# Altium PCB Mach_nap_HEALA.PcbDoc
Units mm, origin at the board's own origin, x right, y up, seen from the top; angles counter-clockwise.
Board outline 30 x 30 mm, 2 copper layers (Top Layer, Bottom Layer); 14 components, 14 nets, 60 pads, 0 vias.
Unrouted connection lines stored in the file: 36.
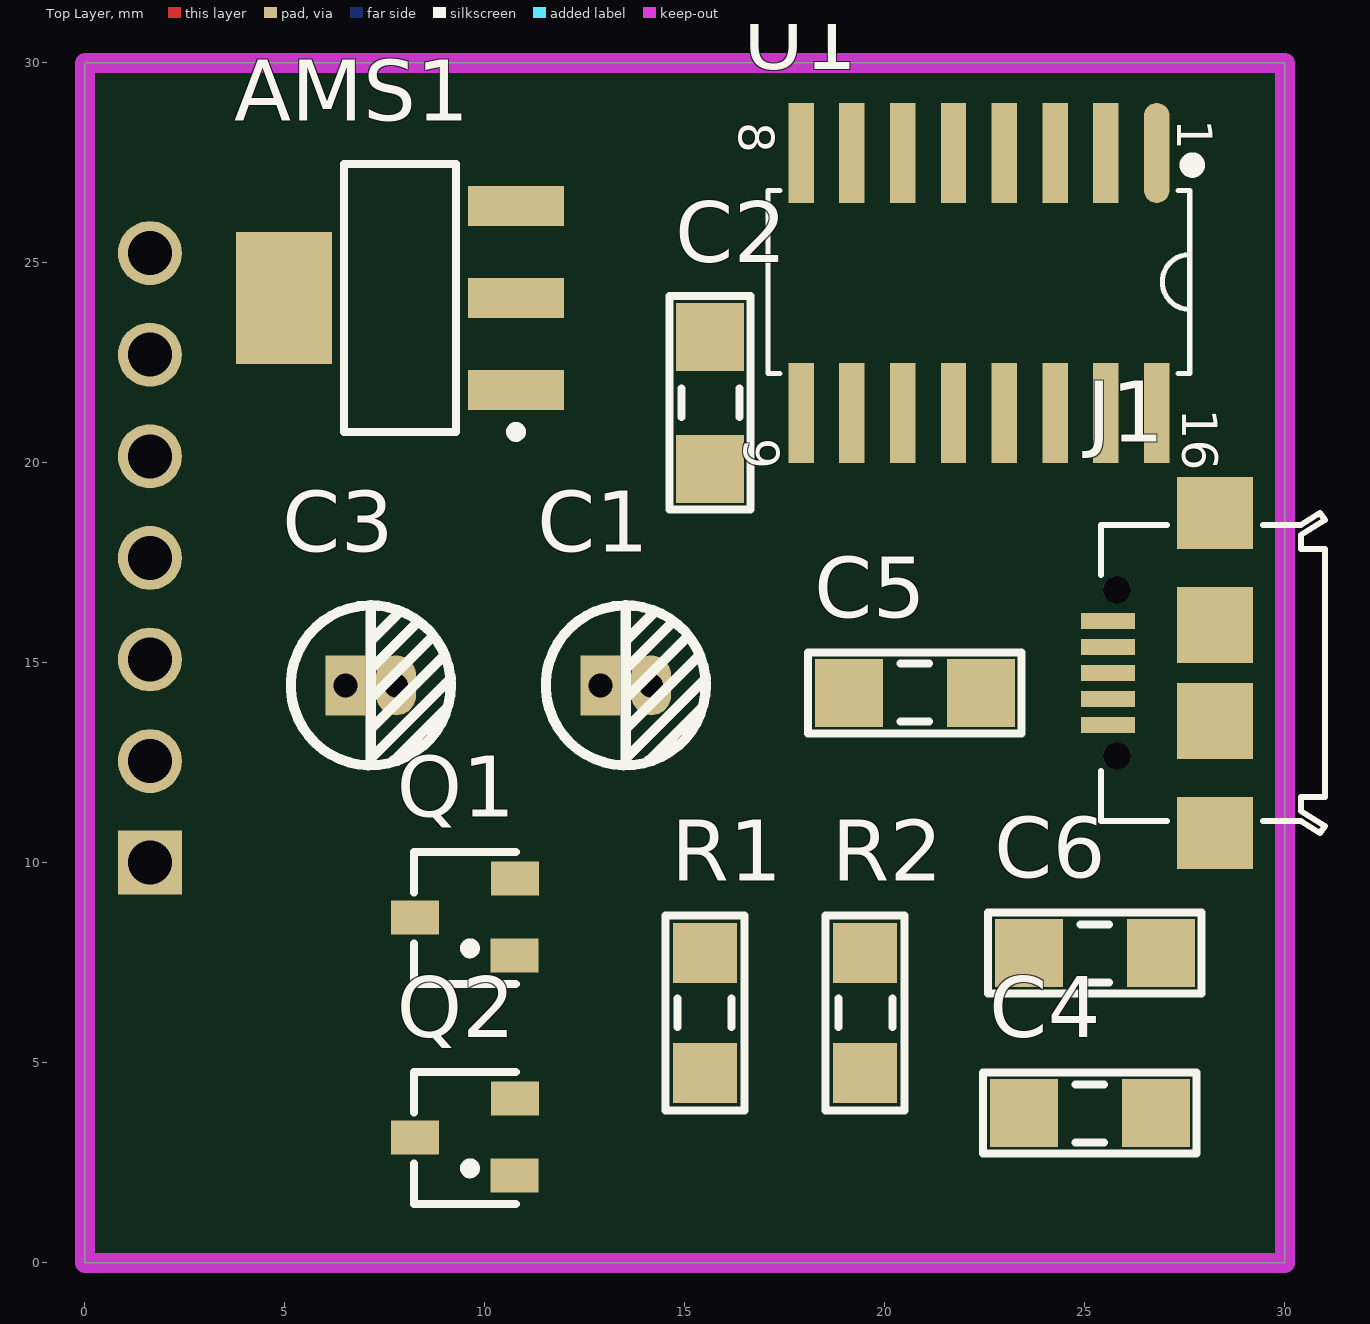
[diagram p0: Top Layer view]
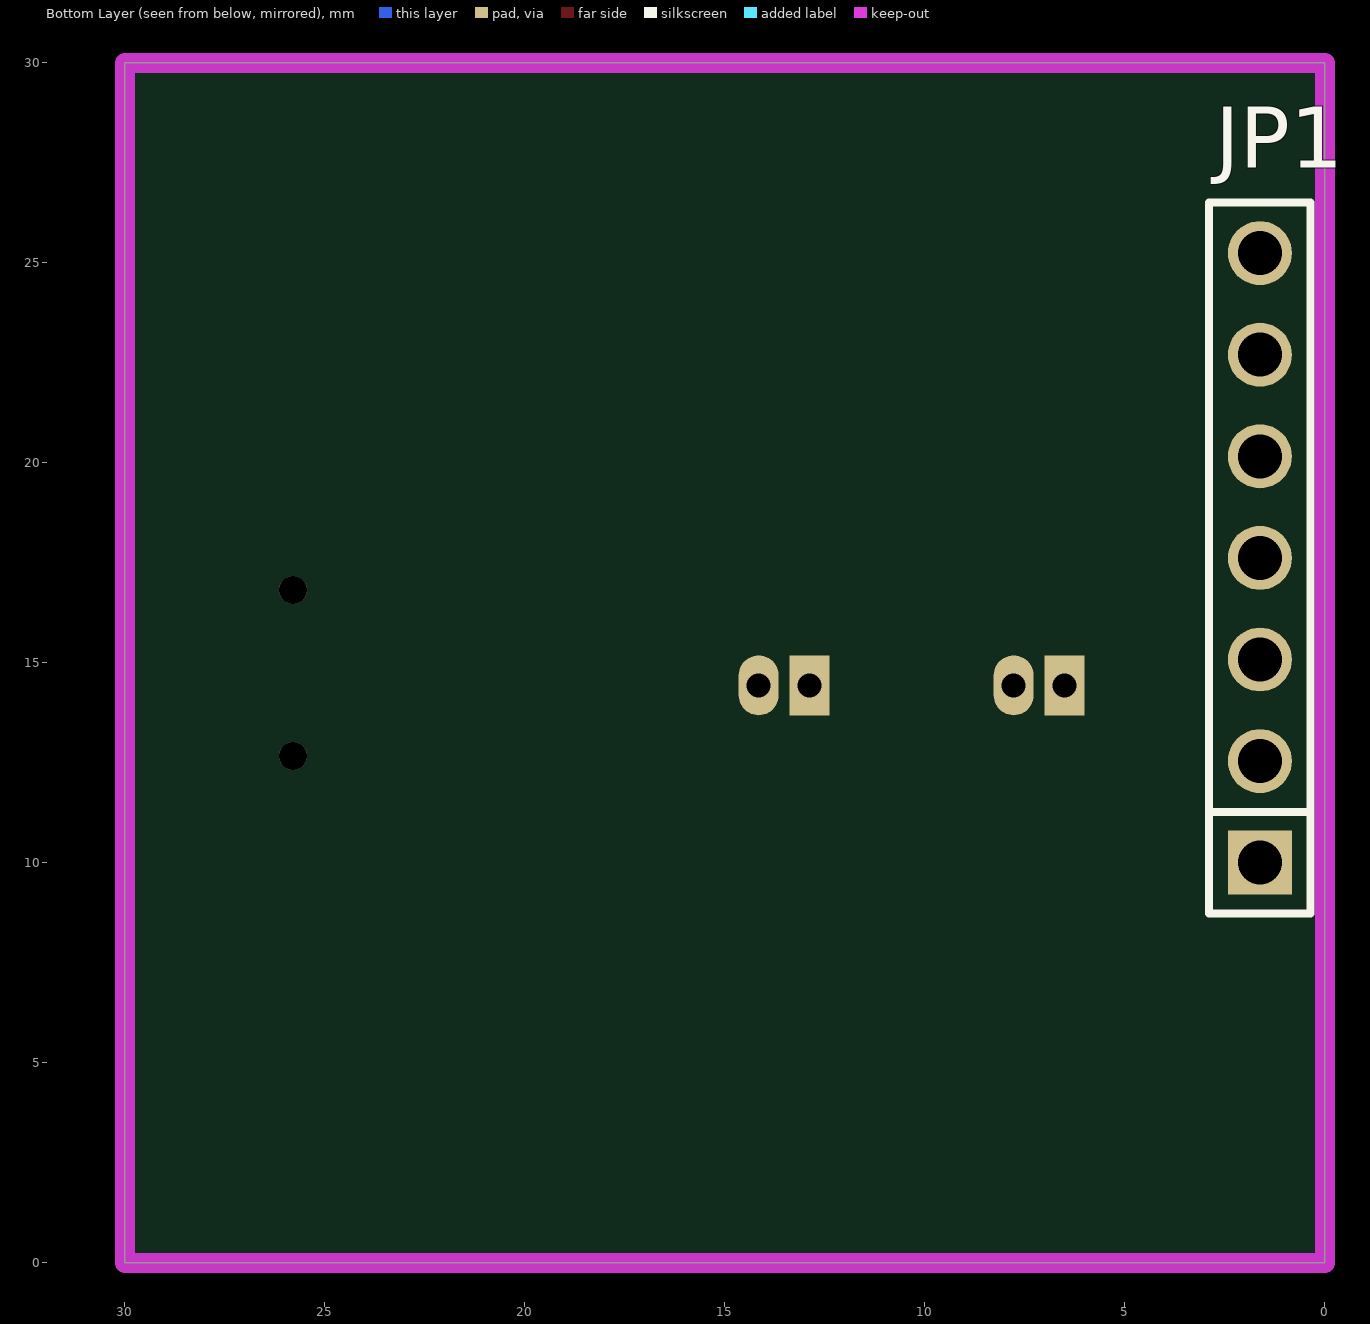
[diagram p1: Bottom Layer view, seen from below]

## Layer stack, top to bottom
Top Solder: solder mask 0.0102, Solder Resist, Dk 3.5
Top Layer: signal copper 0.0356
Dielectric 1: dielectric 0.32, FR-4, Dk 4.8
Bottom Layer: signal copper 0.0356
Bottom Solder: solder mask 0.0102, Solder Resist, Dk 3.5

## Board outline
0,0 30,0 30,30 0,30

## Design rules (kind name [scope] priority, off if disabled: settings)
Clearance [All] p1: gap=0.15 ignorepadtopadclearanceinfootprint=TRUE
PolygonConnect [All] p1: connectstyle=Relief reliefconductorwidth=0.254 reliefentries=4 polygonreliefangle="90 Angle" airgapwidth=0.254
RoutingVias [All] p1: holewidth=0.711 width=1.27 viastyle="Through Hole" minholewidth=0.711 minwidth=1.27 maxholewidth=0.711 maxwidth=1.27
SolderMaskExpansion [All] p1: expansion=0.102 istentingtop=FALSE
SupplyNets "Schematic Supply Nets_2" [InNet('3.3V')] p1: voltage=0.000
SupplyNets "Schematic Supply Nets_1" [InNet('5V')] p2: voltage=0.000
SupplyNets "Schematic Supply Nets" [InNet('GND')] p3: voltage=0.000
Width [All] p1: maxlimit=0.9 minlimit=0.254 preferedwidth=0.5 minimp=50.000000 maximp=50.000000 favimp=50.000000
30 further rules are at their usual default settings.

## Classes and differential pairs
component class Mach_nap_HEALA: AMS1 C2 C5 C6 J1 JP1 Q1 Q2 R1 R2 U1

## Components (designator, comment, footprint, x,y, rotation, side; value= is the part's Value field where it differs from the comment)
AMS1 "AMS1117-3.3V" SOT223 7.875,24.125 r90 top value="AMS1117-3.3V SOT223"
C1 "10uF" "tu hoa 4mm" 13.522,14.44 r0 top
C2 "106" "tu 1206" 15.625,21.5 r270 top
C3 "10uF" "tu hoa 4mm" 7.147,14.44 r0 top
C4 "106" "tu 1206" 25.125,3.75 r180 top
C5 "106" "tu 1206" 20.75,14.25 r0 top
C6 "106" "tu 1206" 25.25,7.75 r180 top
J1 "Micro USB 2.0 Type B" 629105136821 28.25,14.75 r90 top
JP1 "JP 1x7 2.54" "JP 1x7 DT" 1.625,10.005 r90 bottom
Q1 "BC817" SOT-23 9.5,8.625 r90 top value=C9014
Q2 "BC817" SOT-23 9.5,3.125 r90 top value=C9014
R1 "10k" "tro smd 1206" 15.5,6.25 r90 top
R2 "10k" "tro smd 1206" 19.5,6.25 r270 top
U1 "CH340C" SOIC16_50_284_25X90_SMT 22.375,24.5 r270 top

## Footprints (in the part's own frame and the unit in brackets; to place one, negate y for a bottom-side part, rotate by r counter-clockwise, add the part's x,y. Pads: shape width x height; smd on the part's side, far side on the other; paste and mask are expansions set on the pad)
629105136821 [mm] "Micro USB 2.0 SMT Type B Horizontal 5 Contacts"
  rect 0.4x1.35 smd: 1(-1.3,2.675) 2(-0.65,2.675) 3(0,2.675) 4(0.65,2.675) 5(1.3,2.675)
  round 0.7 hole 0.7 unplated: M1(-2.075,2.45) M2(2.075,2.45)
  rect 1.8x1.9 smd: S1(-4,0) S4(4,0)
  rect 1.9x1.9 smd: S2(-1.2,0) S3(1.2,0)
  silkscreen extent -4,-2.75 4,2.85, body extent -4,-2.73 4,3.17, height 2.77
"JP 1x7 DT" [mm] "7 pins, 1 row, straight, gold plating"
  rect 1.6x1.6 hole 1.1: 1(0,0)
  round 1.6 hole 1.1: 2(2.54,0) 3(5.08,0) 4(7.62,0) 5(10.16,0) 6(12.7,0) 7(15.24,0)
  silkscreen extent -1.27,-1.27 16.51,1.27, body extent -1.27,-1.27 16.51,1.27, height 8.54
SOIC16_50_284_25X90_SMT [mm]
  oval 2.5x0.635 smd mask+0.076: 1(-3.25,4.42)
  rect 2.5x0.635 smd mask+0.076: 2(-3.25,3.15) 3(-3.25,1.88) 4(-3.25,0.61) 5(-3.25,-0.66) 6(-3.25,-1.93) 7(-3.25,-3.2) 8(-3.25,-4.47) 9(3.25,-4.47) 10(3.25,-3.2) 11(3.25,-1.93) 12(3.25,-0.66) 13(3.25,0.61) 14(3.25,1.88) 15(3.25,3.15) 16(3.25,4.42)
  silkscreen extent -3.07,-5.3 2.26,5.44, body extent -3.02,-4.97 2.98,4.93, height 1.4
SOT223 [mm]
  rect 1x2.4 smd: 1(-2.3,-2.9) 2(0,-2.9) 3(2.3,-2.9)
  rect 3.3x2.4 smd: 4(0,2.9)
  silkscreen extent -3.47,-3.03 3.35,1.4, body extent -3.25,-3.56 3.25,3.4, height 1.68
SOT-23 [mm] "SOT 23 _ 1-3-2"
  rect 0.85x1.2 smd: 1(-0.94,-1.245) 2(0.985,-1.25) 3(0.005,1.25)
  silkscreen extent -1.65,-1.27 1.65,1.27, body extent -1.47,-1.33 1.53,1.17, height 1.06
"tro smd 1206" [mm]
  rect 1.5x1.6 smd: 1(-1.5,0) 2(1.5,0)
  silkscreen extent -2.44,-0.99 2.44,0.99, body extent -1.6,-0.8 1.6,0.8, height 0.6
"tu 1206" [mm]
  rect 1.7x1.7 smd: 1(-1.65,0) 2(1.65,0)
  silkscreen extent -2.67,-1.02 2.67,1.02, body extent -1.57,-0.8 1.63,0.8, height 0.94
"tu hoa 4mm" [mm]
  rect 1x1.5 hole 0.6: 1(-0.635,0)
  oval 1x1.5 hole 0.6: 2(0.635,0)
  silkscreen extent -2,-2 2.01,2.01, body extent -2.47,-2.47 2.58,2.58, height 14.81

## Part data
AMS1: library part "AMS1117 SMD", "Dán", Chung_Loai=Dán, Don_Vi=Con, Ma_Hang=MH000596
C1 C3: library part "Tu Hoa 10uF 25V 4x7", "Cắm", Chung_Loai=Cắm, Don_Vi=Con, Ma_Hang=MH001349, So_Chan=2, Ten_Linh_Kien="Tụ Hóa 10uF 25V 4x7MM"
C2 C4 C5 C6: library part "Tu 1206 106 16V 20%", "Dán", Chung_Loai=Dán, Don_Vi=Con, Ma_Hang=MH004541, So_Chan=2, Ten_Linh_Kien="Tụ 1206 106-10uF 20% 16V"
J1: library part 629105136821, "Micro USB 2.0 Type B Horizontal SMT 5 Contacts WR-COM", Operating Temperature="-40 to 85 degC", Rated Current="1 A", ComponentLink1Description=Manufacturer, ComponentLink1URL=http://www.we-online.de, ComponentLink2Description=Datasheet, ComponentLink2URL=http://katalog.we-online.de/em/datasheet/629105136821.pdf, Gender=Female, Interface Type="Micro USB 2.0 Type B", Mounting Technology=SMT, Orientation=Horizontal, Packaging="Tape and Reel", Part Number=629105136821, Published Date="May 2018", Publisher="Wurth Elektronik"
JP1: library part "JP 1x7 2.54 Duc Thang", "Cắm", Chung_Loai=Cắm, Don_Vi=Con, Ma_Hang=MH000903, Ten_Linh_Kien="Jump Đơn Đực 2.54MM 1x40P Thẳng 11MM"
Q1 Q2: library part "Trans BC817", "SOT-23 - C8658"
R1 R2: library part "Tro 1206 5% 10k", "Dán", Chung_Loai=Dán, Don_Vi=Con, Ma_Hang=MH005909, So_Chan=2, Ten_Linh_Kien="Trở 1206 5% 10K"
U1: "USB Bridge, USB to UART USB 2.0 UART Interface", Alternate Part Number-1=NA, Case/Package=SOIC16, Manufacturer=Olimex, Supplier Part Number-1=C84681, Manufacturer Part Number=CH340C, Supplier-1=LCSC

## Nets (pads, with @x,y where several pads share a name; then routed paths per layer and width w, separated by ;. In a path a pad name is that pad's centre, name@x,y a point inside that pad or via, vN(x,y) a via of type N, cw(c..) or ccw(c..) an arc to the next point about the centre after c; other vN are vias at no path point)
3.3V: AMS1.2 AMS1.4 C1.1 C2.1 C5.1 JP1.5
5V: AMS1.3 C3.1 C4.1 C6.1 J1.1 JP1.6 U1.16
D+: J1.3 U1.5
D-: J1.2 U1.6
EN: JP1.2 Q1.3
GND: AMS1.1 C1.2 C2.2 C3.2 C4.2 C6.2 J1.4 J1.5 J1.S1 J1.S2 J1.S3 J1.S4 JP1.7 U1.1
IO0: JP1.1 Q2.3
NetC5_2: C5.2 U1.4
NetQ1_1: Q1.1 R1.2
NetQ1_2: Q1.2 R2.1 U1.14
NetQ2_1: Q2.1 R2.2
NetQ2_2: Q2.2 U1.13
RXD0: JP1.4 U1.2
TXD0: JP1.3 U1.3
pads on no net: J1.M1 J1.M2 R1.1 U1.7 U1.8 U1.9 U1.10 U1.11 U1.12 U1.15

## Keep-outs
Keep-Out Layer:
  the board outline again, w0.508

## Text inside footprints (layer, text, board x,y; h text height)
J1: Mechanical 1 "PCB Edge" at 30.35,13.35 h0.76 r90
U1: Top Overlay "1" at 27.303,28.589 h0.89 r270; Top Overlay "8" at 16.343,28.516 h0.89 r270; Top Overlay "9" at 16.466,20.622 h0.89 r270; Top Overlay "16" at 27.43,21.35 h0.89 r270